# Altium PCB MainBayPCB_v2.1.PcbDoc
Units mm, origin at the board's own origin, x right, y up, seen from the top; angles counter-clockwise.
Board outline 100 x 150 mm, 2 copper layers (Top Layer, Bottom Layer); 30 components, 28 nets, 186 pads, 32 vias.
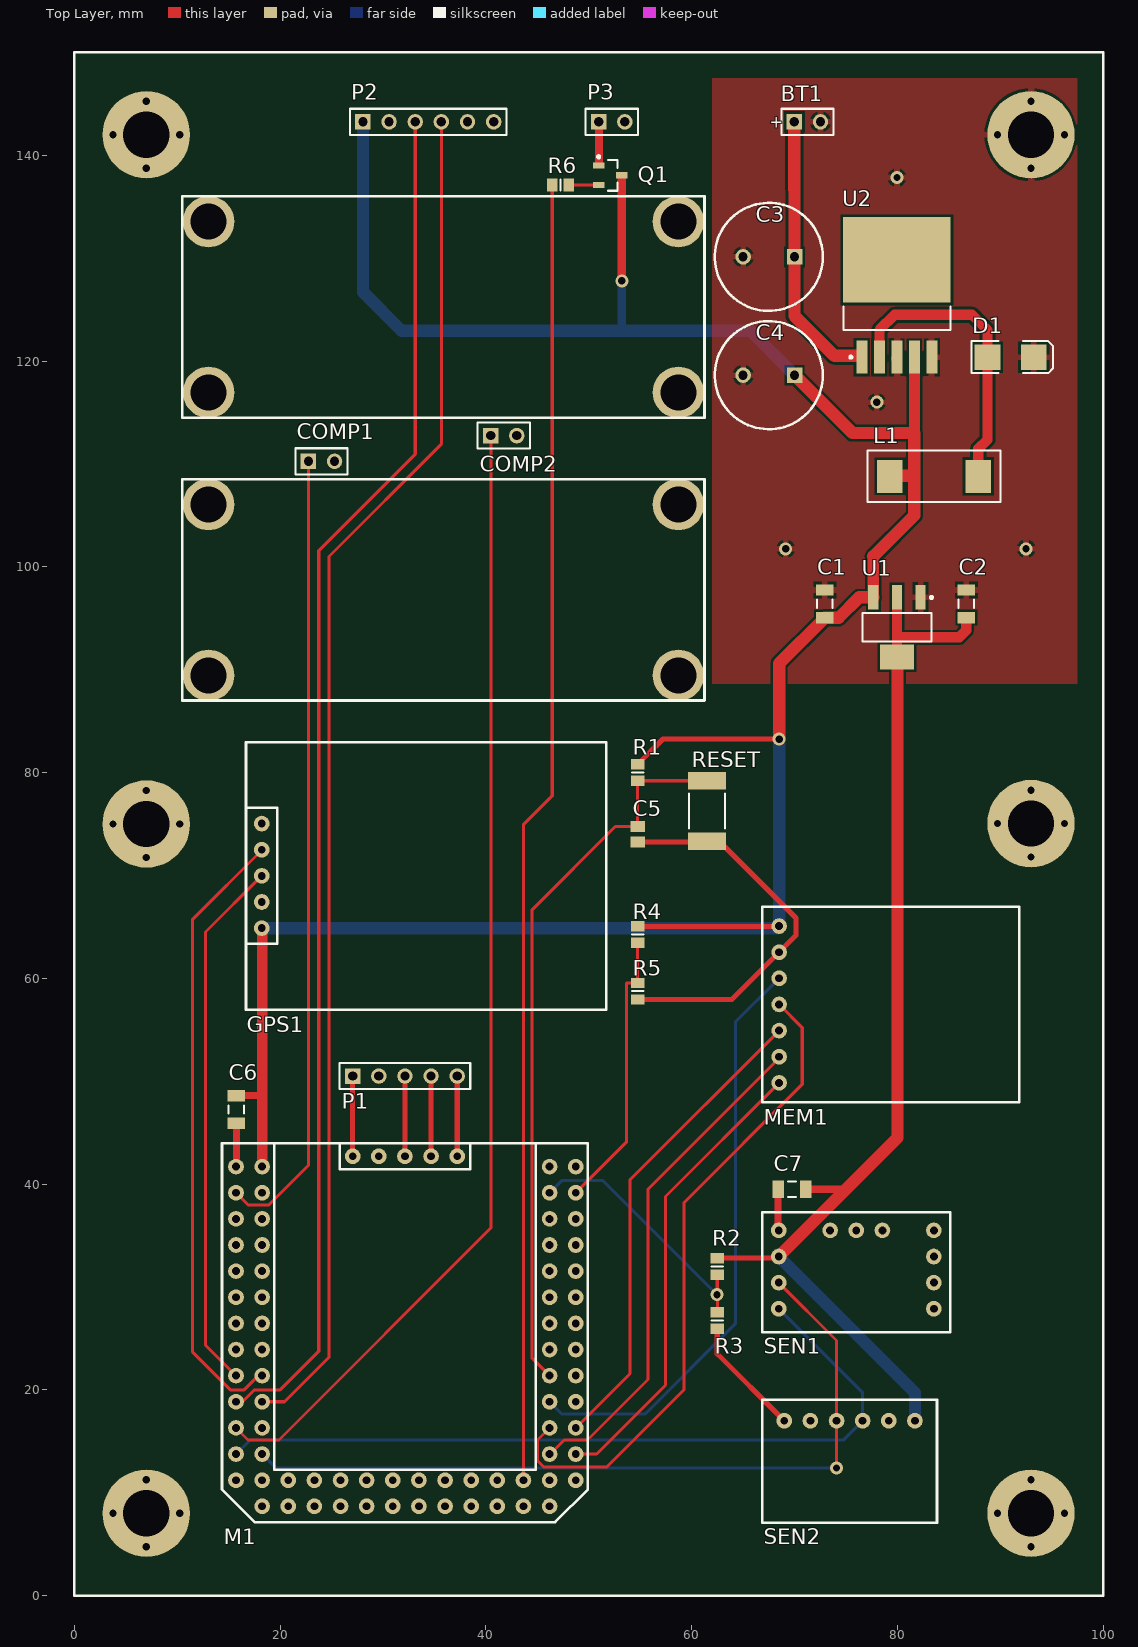
[diagram p0: Top Layer view]
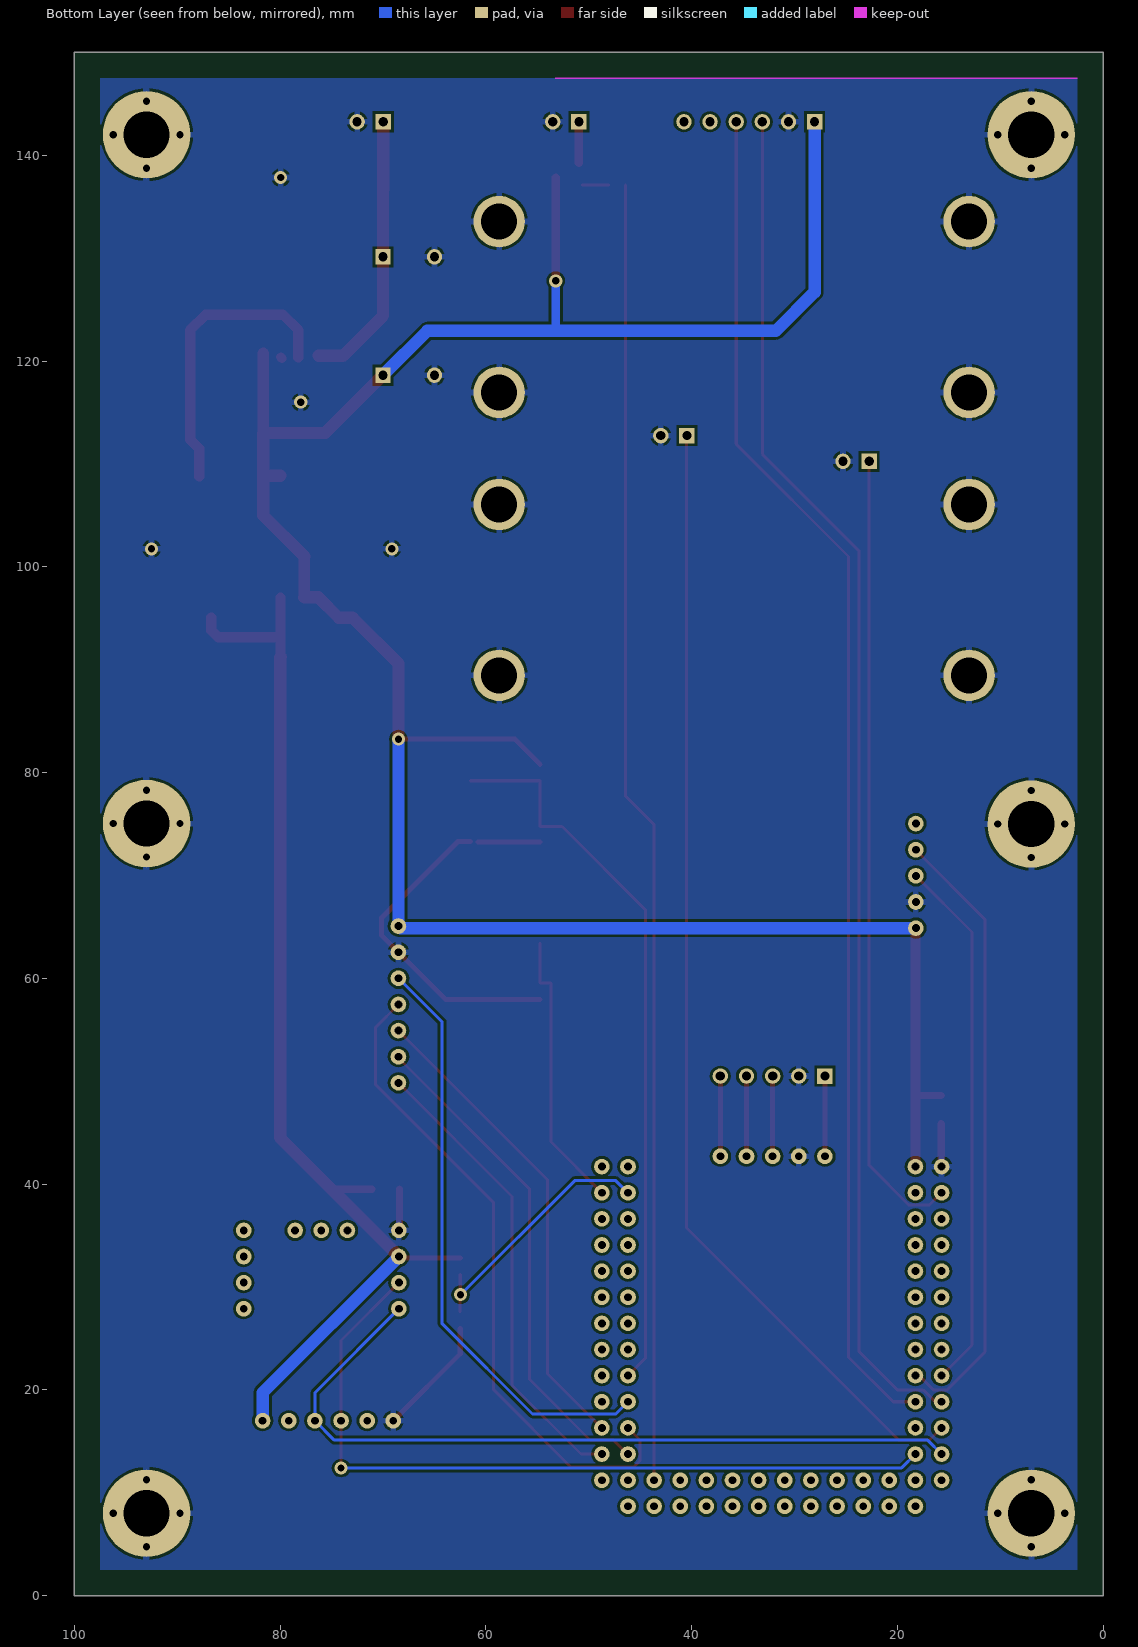
[diagram p1: Bottom Layer view, seen from below]

## Layer stack, top to bottom
Top Solder: solder mask 0.0102, Solder Resist, Dk 3.5
Top Layer: signal copper 0.0356
Dielectric 1: dielectric 0.32, FR-4, Dk 4.8
Bottom Layer: signal copper 0.0356
Bottom Solder: solder mask 0.0102, Solder Resist, Dk 3.5

## Board outline
0,0 100,0 100,150 0,150

## Design rules (kind name [scope] priority, off if disabled: settings)
Clearance [All] p1: gap=0.254 ignorepadtopadclearanceinfootprint=FALSE except(0: Arc-Hole Track-Hole SMDPad-Hole THPad-Hole Via-Hole Fill-Hole Poly-Hole Region-Hole Text-Hole)
PolygonConnect [All] p1: connectstyle=Relief reliefconductorwidth=0.6 reliefentries=4 polygonreliefangle="90 Angle" airgapwidth=0.254
RoutingVias [All] p1: holewidth=0.711 width=1.27 viastyle="Through Hole" minholewidth=0.711 minwidth=1.27 maxholewidth=0.711 maxwidth=1.27
SMDNeckDown [All] p1: percent=50.000
SolderMaskExpansion [All] p1: expansion=0.102
Width Camera [InNet('NetP3_1')] p1: maxlimit=1 minlimit=0.8 preferedwidth=0.8 minimp=50.000000 maximp=50.000000 favimp=50.000000
Width D1 [InNet('NetD1_1')] p2: maxlimit=1.2 minlimit=1 preferedwidth=1.1 minimp=50.000000 maximp=50.000000 favimp=50.000000
Width VBAT [InNet('VBAT')] p3: maxlimit=1.2 minlimit=1 preferedwidth=1.2 minimp=50.000000 maximp=50.000000 favimp=50.000000
Width GND [InNet('GND')] p4: maxlimit=1.2 minlimit=0.5 preferedwidth=1.2 minimp=50.000000 maximp=50.000000 favimp=50.000000
Width 5VDC [InNet('+5VDC')] p5: maxlimit=1.2 minlimit=0.5 preferedwidth=1.2 minimp=50.000000 maximp=50.000000 favimp=50.000000
Width 3.3VDC [InNet('+3.3VDC')] p6: maxlimit=1.2 minlimit=0.5 preferedwidth=1.2 minimp=50.000000 maximp=50.000000 favimp=50.000000
Width [All] p7: maxlimit=0.3 minlimit=0.25 preferedwidth=0.3 minimp=50.000000 maximp=50.000000 favimp=50.000000
30 further rules are at their usual default settings.

## Components (designator, comment, footprint, x,y, rotation, side; value= is the part's Value field where it differs from the comment)
BT1 "Battery" BAT-2 71.25,143.25 r0 top
C1 "Cap Semi" C1206 72.95,96.402 r270 top value=1uF
C2 "Cap Semi" C1206 86.7,96.402 r270 top value=100pF
C3 "Cap Pol3" RB5-10.5 67.5,130.125 r180 top value=680uF
C4 "Cap Pol3" RB5-10.5 67.5,118.625 r180 top value=10uF
C5 "Cap Pol3" C0805 54.75,74 r270 top value=10uF
C6 "Cap Semi" C1206 15.75,47.25 r90 top value=1uF
C7 "Cap Semi" C1206 69.75,39.5 r0 top value=1uF
COMP1 "Header 2" HDR1X2 22.75,110.25 r0 top
COMP2 "Header 2" HDR1X2 40.46,112.75 r0 top
D1 "D Schottky" SMB 91,120.375 r0 top
GPS1 "Neo-6M Module" "Neo-6M GPS Module" 18.21,75.04 r270 top
L1 "Inductor" Inductor 83.55,108.791 r180 top value=33uH
M1 "ATMega2560 Breakout" "ATMEGA2560 Breakout" 37.21,42.7 r180 top
MEM1 "uSD Card Reader" "uSD Card Reader" 68.5,65.08 r270 top
P1 "Serial Connector" HDR1X5 27.05,50.5 r0 top
P2 "Radio Connector" HDR1X6 28.05,143.25 r0 top
P3 "Header 2" HDR1X2 50.96,143.25 r0 top
Q1 "PNP" SOT-23B_N 52.085,138.05 r0 top
R1 "Res3" 6-0805_L 54.75,80 r270 top value=10K
R2 "Res3" 6-0805_L 62.5,32 r90 top value=1M
R3 "Res3" 6-0805_L 62.5,26.75 r270 top value=100K
R4 "Res3" 6-0805_L 54.75,64.25 r90 top value=1M
R5 "Res3" 6-0805_L 54.75,58.75 r270 top value=100K
R6 "Res3" 6-0805_L 47.25,137.111 r0 top value=10K
RESET "KSS221GLFS" KSS-2G 61.5,76.25 r270 top
SEN1 "IMU" "Sparkfun IMU" 78.54,35.5 r180 top
SEN2 "Pressure Sensor" "Barometric Pressure Sensor" 81.7,17 r180 top
U1 "LD1117S33TR" SOT-223_N 79.95,94.125 r270 top
U2 "LM2592HVS-5.0/NOPB" TS5B_N 79.95,126.375 r90 top

## Footprints (in the part's own frame and the unit in brackets; to place one, negate y for a bottom-side part, rotate by r counter-clockwise, add the part's x,y. Pads: shape width x height; smd on the part's side, far side on the other; paste and mask are expansions set on the pad)
6-0805_L [mm] "Chip Resistor, Body 2.0x1.2mm, IPC High Density"
  rect 1x1.3 smd: 1(-0.8,0) 2(0.8,0)
  silkscreen extent 0,-0.55 0,0.55, body extent -1.07,-0.7 1.07,0.7, height 0.7
"ATMEGA2560 Breakout" [mil] "Tindie breakout board for ATMega2560"
  round 60 hole 30: 2(746.45,239.37) 3(846.45,239.37) 4(746.45,339.37) 5(846.45,339.37) 6(746.45,439.37) 7(846.45,439.37) 8(746.45,539.37) 9(846.45,539.37) 10(746.45,639.37) 11(846.45,639.37) 12(746.45,739.37) 13(846.45,739.37) 22(746.45,1239.37) 23(846.45,1239.37) 24(746.45,1339.37) 25(646.45,1239.37) 26(646.45,1339.37) 27(546.45,1239.37) 28(546.45,1339.37) 29(446.45,1239.37) 30(446.45,1339.37) 31(346.45,1239.37) 32(346.45,1339.37) 33(246.45,1239.37) 34(246.45,1339.37) 35(146.45,1239.37) 36(146.45,1339.37) 37(46.45,1239.37) 38(46.45,1339.37) 39(-53.55,1239.37) 40(-53.55,1339.37) 41(-153.55,1239.37) 42(-153.55,1339.37) 43(-253.55,1239.37) 44(-253.55,1339.37) 45(-353.55,1339.37) 46(-353.55,1239.37) 47(-453.55,1239.37) 48(-353.55,1139.37) 49(-453.55,1139.37) A0(-453.55,39.37) A1(-353.55,39.37) A2(-453.55,139.37) A3(-353.55,139.37) A4(-453.55,239.37) A5(-353.55,239.37) A6(-453.55,339.37) A7(-353.55,339.37) A8(-453.55,439.37) A9(-353.55,439.37) A10(-453.55,539.37) A11(-353.55,539.37) A12(-453.55,639.37) A13(-353.55,639.37) A14(-453.55,739.37) A15(-353.55,739.37) DTR(0,0) EXT5V(746.45,39.37) GND(300,0) GND(846.45,39.37) MISO(-353.55,1039.37) MOSI(-453.55,1039.37) REF(-453.55,839.37) RESET(-353.55,839.37) RX(200,0) RX0(846.45,139.37) RX1(846.45,1039.37) RX2(846.45,939.37) RX3(846.45,839.37) SCK(-353.55,939.37) SCl(846.45,1139.37) SDA(746.45,1139.37) SS(-453.55,939.37) TX(100,0) TX0(746.45,139.37) TX1(746.45,1039.37) TX2(746.45,939.37) TX3(746.45,839.37) "USB 5V"(400,0)
  silkscreen extent -500,-50 900,1400
"Barometric Pressure Sensor" [mil]
  round 60 hole 30: 1(0,0) 2(100,0) 3(200,0) 4(300,0) 5(400,0) 6(500,0)
  silkscreen extent -84,-80 585,390
BAT-2 [mm] "Battery; 2 Leads"
  rect 1.5x1.5 hole 0.9: 1(-1.27,0)
  round 1.5 hole 0.9: 2(1.27,0)
  silkscreen extent -2.54,-1.27 2.54,1.27
C0805 [mm] "Chip Capacitor, Body 2.0x1.3mm, IPC High Density"
  rect 1.1x1.4 smd: 1(-0.75,0) 2(0.75,0)
  body extent -1.1,-0.72 1.1,0.72, height 1.4
C1206 [mm] "Chip Capacitor, Body 3.2x1.6mm, IPC High Density"
  rect 1.1x1.7 smd: 1(-1.35,0) 2(1.35,0)
  silkscreen extent -0.4,-0.75 0.4,0.75, body extent -1.7,-0.9 1.7,0.9, height 1.3
HDR1X2 [mm] "Connector; Header; 2 Position"
  rect 1.5x1.5 hole 0.9: 1(0,0)
  round 1.5 hole 0.9: 2(2.54,0)
  silkscreen extent -1.27,-1.27 3.81,1.27
HDR1X5 [mm] "Connector; Header; 5 Position"
  rect 1.5x1.5 hole 0.9: 1(0,0)
  round 1.5 hole 0.9: 2(2.54,0) 3(5.08,0) 4(7.62,0) 5(10.16,0)
  silkscreen extent -1.27,-1.27 11.43,1.27
HDR1X6 [mm] "Connector; Header; 6 Position"
  rect 1.5x1.5 hole 0.9: 1(0,0)
  round 1.5 hole 0.9: 2(2.54,0) 3(5.08,0) 4(7.62,0) 5(10.16,0) 6(12.7,0)
  silkscreen extent -1.27,-1.27 13.97,1.27
Inductor [mm]
  rect 2.5x3.2 smd: 1(-4.304,0) 2(4.304,0)
  silkscreen extent -6.45,-2.5 6.45,2.5
KSS-2G [mm] "Switch, Side Tact, SM; 2 Leads; Body 7x3.5mm (LxW)"
  rect 1.7x3.7 smd: 1(2.95,0) 2(-2.95,0)
  silkscreen extent -1.7,-1.75 1.7,1.75, body extent -2.75,-2.65 2.75,1.75, height 1.75
"Neo-6M GPS Module" [mil] "GPS Module"
  round 60 hole 30: 1(0,0) 2(100,0) 3(200,0) 4(300,0) 5(400,0)
  silkscreen extent -312,-60 712,1318
RB5-10.5 [mm] "Capacitor (Radial); 2 Leads"
  rect 1.5x1.5 hole 0.9: 1(-2.5,0)
  round 1.5 hole 0.9: 2(2.5,0)
  silkscreen extent -5.25,-5.25 5.25,5.25
SMB [mm] "DO-214-AA/SMB; 2 C-Bend Leads; Body 5.3 x 3.6 mm, inc. leads (LxW)"
  rect 2.5x2.5 smd: 1(-2.25,0) 2(2.25,0)
  silkscreen extent -3.8,-1.55 4.1,1.55
SOT-23B_N [mm] "SOT23, 3-Leads, Body 2.9x1.3mm, Pitch 0.95mm, Lead Span 2.4mm, IPC Medium Density"
  rect 1.15x0.6 smd: 1(-1.125,0.95) 2(-1.125,-0.95) 3(1.125,0)
  silkscreen extent -1.25,-1.5 0.7,1.92, body extent -0.7,-1.5 0.7,1.5, height 1.14
SOT-223_N [mm] "SOT223, 4-Leads, Body 6.5x3.5mm, Pitch 2.3mm, Lead Span 7mm, IPC Medium Density"
  rect 2.4x1 smd: 1(-2.9,2.3) 2(-2.9,0) 3(-2.9,-2.3)
  rect 2.4x3.3 smd: 4(2.9,0)
  silkscreen extent -3.02,-3.35 1.4,3.48, body extent -1.85,-3.35 1.85,3.35, height 1.8
"Sparkfun IMU" [mil] "MPU-9250 breakout footprint"
  round 60 hole 30: 1(-196.85,300) 2(-196.85,200) 3(-196.85,100) 4(-196.85,0) 5(0,0) 6(100,0) 7(200,0) 8(396.85,0) 9(396.85,100) 10(396.85,200) 11(396.85,300)
  silkscreen extent -260,-70 460,390
TS5B_N [mm] "D2-PAK, 6-Leads, Body 8.6x10.2mm, Pitch 1.7mm, Lead Span 14.1mm, IPC Medium Density"
  rect 3.2x1.05 smd: 1(-6,3.4) 2(-6,1.7) 3(-6,0) 4(-6,-1.7) 5(-6,-3.4)
  rect 8.3x10.45 smd: 6(3.45,0)
  silkscreen extent -6.12,-5.2 -1.1,5.2, body extent -3.35,-5.2 6.05,5.2, height 4.65
"uSD Card Reader" [mil] "micro SD card reader from sparkfun"
  round 60 hole 30: 1(600,0) 2(500,0) 3(400,0) 4(300,0) 5(200,0) 6(100,0) 7(0,0)
  silkscreen extent -74,-65 674,919

## Part data
BT1: "Multicell Battery", LatestRevisionDate=17-Jul-2002, LatestRevisionNote="Re-released for DXP Platform.", PackageDescription="Battery; 2 Leads", PackageReference=BAT-2, Published=24-Mar-1999, Publisher="Altium Limited"
C1 C2 C6 C7: "Capacitor (Semiconductor SIM Model)", LatestRevisionDate=29-May-2009, LatestRevisionNote="IPC-7351 Footprint Added.", PackageDescription="Chip Capacitor", PackageReference=C1206, Published=8-Jun-2000, Publisher="Altium Limited"
C3 C4 C5: "Polarized Capacitor (Surface Mount)", LatestRevisionDate=29-May-2009, LatestRevisionNote="IPC-7351 Footprint Added.", PackageDescription="Chip Capacitor", PackageReference=C0805, Published=8-Jun-2000, Publisher="Altium Limited"
COMP1 COMP2 P3: "Header, 2-Pin", LatestRevisionDate=17-Jul-2002, LatestRevisionNote="Re-released for DXP Platform.", Publisher="Altium Limited"
D1: "Schottky Diode", Code_JEDEC=DO-214-AA, LatestRevisionDate=17-Jul-2002, LatestRevisionNote="Re-released for DXP Platform.", PackageDescription="DO-214-AA/SMB; 2 C-Bend Leads; Body 5.3 x 3.6 mm, inc. leads (LxW)", PackageReference=SMB, Published=8-Jun-2000, Publisher="Altium Limited"
GPS1: "Serial GPS module"
M1: "Tindie's breakout board for the ATMega2560"
MEM1: "SPI interface micro SD card reader from sparkfun.", Date created="July 29, 2018"
P1: library part "Header 5", "Header, 5-Pin", LatestRevisionDate=17-Jul-2002, LatestRevisionNote="Re-released for DXP Platform.", Publisher="Altium Limited"
P2: library part "Header 6", "Header, 6-Pin", LatestRevisionDate=17-Jul-2002, LatestRevisionNote="Re-released for DXP Platform.", Publisher="Altium Limited"
Q1: "PNP Bipolar Transistor", LatestRevisionDate=29-May-2009, LatestRevisionNote="IPC-7351 Footprint Added.", PackageDescription="3-Pin SOT-23 Package 0.95 mm Pitch, 2.4 mm Lead Span", PackageReference=SOT-23B, PackageVersion=Aug-1999, Published=8-Jun-2000, Publisher="Altium Limited"
R1 R2 R3 R4 R5 R6: "Resistor", LatestRevisionDate=29-May-2009, LatestRevisionNote="IPC-7351 Footprint Added.", PackageDescription="Chip Resistor", PackageReference=J1-0603, Published=8-Jun-2000, Publisher="Altium Limited"
RESET: "Switch, Subminiature Side-Actuated Tact, SMT, KSS Series, Std Actuator, 2 Gull Wing Leads, SPST, 2N Force, Silver Contact", ComponentLink1Description="Manufacturer Link", ComponentLink1URL=http://www.ck-components.com/, ComponentLink2Description=Datasheet, ComponentLink2URL=http://www.ck-components.com/media/pdf/catalogs/Tactile_Switches%5CKSS_series_Tactile_August_2007.pdf, DatasheetVersion=Aug-2007, PackageDescription="Subminiature SMT Side Actuated Switch, Body 7 x 3.5 mm (LxW)", PackageReference=KSS-2G, PackageVersion=Aug-2007, PCB_Layout="Complies with manufacturer's recommendation.", Published=14-Mar-2008, Publisher="Altium Limited"
SEN1: library part "Inertial Measurement Unit", "MPU-9250 breakout board from sparkfun."
SEN2: library part "Baromateric Pressure Sensor", "MS5611-01BA03 Barometric Pressure Sensor, Variometer."
U1: "Fixed Low Drop Positive Voltage Regulator, 3.3V, 4-Pin SOT-223, Tape and Reel", ComponentLink1Description="Manufacturer URL", ComponentLink1URL=http://www.st.com, ComponentLink2Description=Datasheet, ComponentLink2URL=http://www.st.com/internet/com/TECHNICAL_RESOURCES/TECHNICAL_LITERATURE/DATASHEET/CD00000544.pdf, DatasheetVersion=Nov-2011, PackageDescription="4-Pin SOT-223 Package, 6.5 x 3.5 mm Body, 2.3 mm Pitch, 7 mm Lead Span", PackageReference=SOT-223, PackageVersion=2010, PartNumber=LD1117S33TR
U2: "SIMPLE SWITCHER® Power Converter 150 KHz 2A Step-Down Voltage Regulator, 5-pin TO-263, Pb-Free", Manufacturer="National Semiconductor", PackageTopMarking="NSUZXYTTE#*LM2592HVS*-5.0 P+", PowerWise=N, Supplier Part Number 1=LM2592HVS-5.0-ND, Code_JEDEC=MO-169-AB, ComponentLink1Description="LM2592HV Datasheet", ComponentLink1URL=http://www.national.com/ds/LM/LM2592HV.pdf, ComponentLink2Description="LM2592HV Web Page", ComponentLink2URL=http://www.national.com/pf/LM/LM2592HV.html, ComponentLink3Description="TS5B Package Page", ComponentLink3URL=http://www.national.com/packaging/folders/ts5b.html, CompType=Switcher, DatasheetVersion=Aug-2001, PackageDescription="TO-263, Molded, .400 x .390 x .180in, 5 Lead, .067in Pitch, Surface Mount", PackageReference=TS5B, PackageVersion="revD, Apr-2005", PartNumber=LM2592HVS-5.0/NOPB, PinCount=5, Published=1-Mar-2010, Publisher="Altium Limited", RoHS=Y, Supplier 1=Digi-Key, Supplier 2=Farnell, Supplier Part Number 2=1469187
L1: Code_IEC=1005, Code_JEITA=0402, LatestRevisionDate=29-May-2009, LatestRevisionNote="IPC-7351 Footprint Added.", PackageDescription="Chip Inductor", PackageReference=0402-A, Published=8-Jun-2000, Publisher="Altium Limited"

## Free pads (board coordinates)
  round 8.5 hole 4.5: Mount(7,8) Mount(7,75) Mount(7,142) Mount(92.982,8) Mount(92.982,75.04) Mount(92.982,142)
  round 5 hole 3.5: Mount(13.04,89.445) Mount(13.04,106.055) Mount(13.04,116.945) Mount(13.04,133.555) Mount(58.71,89.445) Mount(58.71,106.055) Mount(58.71,116.945) Mount(58.71,133.555)

## Via types
v1: diameter 1.27, hole 0.711, Top Layer to Bottom Layer, 32 vias

## Nets (pads, with @x,y where several pads share a name; then routed paths per layer and width w, separated by ;. In a path a pad name is that pad's centre, name@x,y a point inside that pad or via, vN(x,y) a via of type N, cw(c..) or ccw(c..) an arc to the next point about the centre after c; other vN are vias at no path point)
+3.3VDC: C2.2 C7.2 R2.2 SEN1.9 SEN2.1 U1.2 U1.4 | length 108.4
  Top Layer w0.5: R2.2 SEN1.9@68.46,32.8
  Top Layer w0.7: C7.2 75,39.5
  Top Layer w1: U1.4@79.965,91.225 U1.2@79.965,97.025 ; 80,93.143 86.016,93.143 86.7,93.828 C2.2
  Top Layer w1.2: SEN1.9 80,44.5 80,91.175 U1.4 U1.4@79.965,91.225
  Bottom Layer w1.2: SEN1.9 81.7,19.72 SEN2.1
+5VDC: C1.2 C4.1 C6.2 GPS1.5 L1.2 M1.EXT5V MEM1.7 P2.1 Q1.3 R1.1 R4.2 U1.3 U2.4 | length 259.1
  Top Layer w0.5: R4.2 MEM1.7@68,65.05 ; R1.1 57.2,83.25 v1(68.5,83.25)
  Top Layer w0.7: C6.2 18.25,48.6
  Top Layer w0.8: v1(53.21,127.79) Q1.3@53.21,137.83
  Top Layer w1: M1.EXT5V GPS1.5@18.25,64.84
  Top Layer w1.1: U1.3 77.65,101.014 ; 81.65,113 U2.4 U2.4@81.65,120.75
  Top Layer w1.2: GPS1.5 GPS1.5@18.25,64.84 ; v1(68.5,83.25) 68.5,90.602 C1.2 74.301,95.052 76.274,97.025 U1.3 ; C4.1 75.625,113 81.65,113 81.65,105.014 77.65,101.014 ; L1.2@79.971,108.838 81.571,108.838
  Bottom Layer w0.8: 53.21,122.978 v1(53.21,127.79)
  Bottom Layer w1.2: GPS1.5 68.3,64.88 MEM1.7 v1(68.5,83.25) ; P2.1 28.05,126.7 31.812,122.938 65.687,122.938 C4.1
GND: BT1.2 C1.1 C2.1 C3.2 C4.2 C5.2 C6.1 C7.1 COMP1.2 COMP2.2 D1.2 GPS1.4 M1.GND MEM1.6 P1.2 P2.2 P3.2 pad.Mount R3.2 R5.2 RESET.1 SEN1.8 SEN2.6 U1.1 U2.3 U2.5 | length 76.1
  Top Layer w0.5: R5.2 63.9,57.95 70.135,64.185 70.135,65.865 62.7,73.3 RESET.1 ; C5.2 RESET.1@60.75,73.25 ; R3.2 62.49,25.95 62.49,23.51 68.875,17.125 SEN2.6@69.125,17.125
  Top Layer w0.7: M1.GND@15.75,41.74 C6.1 ; SEN1.8@68.4,35.5 C7.1
  Top Layer w0.9: U2.3@79.824,120.249 U2.3
  Top Layer w1.2: v1(3.75,8) v1(7,4.75) ; v1(3.75,142) v1(7,138.75) ; v1(92.982,4.75) v1(96.232,8) ; v1(92.982,71.79) v1(96.232,75.04)
  Bottom Layer w1.2: pad.Mount@89.561,75.211 v1(89.732,75.04)
  other v1: 10.25,8 89.732,8 7,11.25 92.982,11.25 7,71.75 3.75,75 10.25,75 7,78.25 92.982,78.29 69.139,101.75 92.5,101.75 78,116 79.95,137.83 92.982,138.75 10.25,142 89.732,142 96.232,142 7,145.25 92.982,145.25
NetC5_1: C5.1 M1.RESET R1.2 RESET.2 | length 70.8
  Top Layer w0.3: M1.RESET 44.5,23.07 44.5,66.666 52.584,74.75 C5.1 R1.2 58.121,79.2 RESET.2
NetCOMP1_1: COMP1.1 M1.RX0 | length 77.6
  Top Layer w0.3: M1.RX0 16.896,37.975 18.904,37.975 22.75,41.821 COMP1.1
NetCOMP2_1: COMP2.1 M1.RX1 | length 110.9
  Top Layer w0.3: M1.RX1 16.876,15.134 19.884,15.134 40.5,35.75 40.5,112.75 COMP2.1
NetD1_1: D1.1 L1.1 U2.2 | length 29
  Top Layer w1: U2.2 78.25,123.024 79.726,124.5 87.25,124.5 88.726,123.024 88.75,123 D1.1 88.75,115.911 88.75,112.359 87.854,111.463 L1.1
NetGPS1_2: GPS1.2 M1.TX3 | length 60.5
  Top Layer w0.3: GPS1.2 18.23,72.48 11.5,65.75 11.5,23.661 15.155,20.006 16.506,20.006 17.88,21.38 M1.TX3
NetGPS1_3: GPS1.3 M1.RX3 | length 52.1
  Top Layer w0.3: M1.RX3 12.75,24.34 12.75,64.5 GPS1.3
NetM1_43: M1.43 R6.1 | length 127
  Top Layer w0.3: M1.43 43.643,11.22 43.643,74.933 46.45,77.74 R6.1@46.45,137.1
NetM1_48: M1.48 MEM1.2 | length 49.1
  Top Layer w0.3: M1.48 46.26,13.76 47.625,15.125 49.875,15.125 55.75,21 55.75,39.5 MEM1.2@68.5,52.25
NetM1_49: M1.49 MEM1.1 | length 45.5
  Top Layer w0.3: M1.49 50.76,13.76 57.46,20.46 57.46,38.8 MEM1.1
NetM1_A2: M1.A2 R4.1 R5.1 | length 27.4
  Top Layer w0.3: M1.A2 53.676,44.106 53.676,59.55 R5.1 R4.1
NetM1_A3: M1.A3 R2.1 R3.1 | length 27
  Top Layer w0.3: v1(62.465,29.25) 62.465,31.2 R2.1 R3.1
  Bottom Layer w0.3: M1.A3 47.367,40.337 51.378,40.337 v1(62.465,29.25)
NetM1_DTR: M1.DTR P1.5 | length 7.8
  Top Layer w0.5: M1.DTR P1.5
NetM1_MISO: M1.MISO MEM1.4 | length 64.4
  Top Layer w0.3: M1.MISO 45.015,15.125 45.015,13.108 45.624,12.498 51.748,12.498 59.25,20 59.25,38.2 70.75,49.7 70.75,55.21 MEM1.4
NetM1_MOSI: M1.MOSI MEM1.3 | length 46.8
  Top Layer w0.3: M1.MOSI 54.006,21.576 54.006,40.426 MEM1.3
NetM1_RX: M1.RX P1.3 | length 7.8
  Top Layer w0.5: M1.RX P1.3
NetM1_RX2: M1.RX2 P2.3 | length 133.5
  Top Layer w0.3: M1.RX2 16.34,18.84 17.506,20.006 20.006,20.006 23.75,23.75 23.75,101.571 33.13,110.951 P2.3
NetM1_SCK: M1.SCK MEM1.5 | length 57.5
  Bottom Layer w0.3: M1.SCK 47.376,17.655 55.48,17.655 64.25,26.425 64.25,55.75 MEM1.5
NetM1_SCL: M1.SCl SEN1.11 SEN2.3 | length 76.5
  Bottom Layer w0.3: M1.SCl 17.065,15.115 74.735,15.115 SEN2.3 76.62,19.72 SEN1.11
NetM1_SDA: M1.SDA SEN1.10 SEN2.4 | length 76.7
  Top Layer w0.3: SEN1.10 74.08,24.8 SEN2.4 v1(74.08,12.397)
  Bottom Layer w0.3: M1.SDA 19.588,12.422 39.554,12.422 39.579,12.397 v1(74.08,12.397)
NetM1_TX: M1.TX P1.4 | length 7.8
  Top Layer w0.5: M1.TX P1.4
NetM1_TX2: M1.TX2 P2.4 | length 132.9
  Top Layer w0.3: M1.TX2 20.42,18.84 24.75,23.17 24.75,101 35.67,111.92 P2.4
"NetM1_USB 5V": "M1.USB 5V" P1.1 | length 7.8
  Top Layer w0.5: 27.05,42.7 P1.1
NetP3_1: P3.1 Q1.1 | length 4.3
  Top Layer w0.3: Q1.1 Q1.1@50.96,139.25
  Top Layer w0.8: Q1.1@50.96,139.25 50.984,139.274 P3.1@50.984,143.25
NetQ1_2: Q1.2 R6.2 | length 2.6
  Top Layer w0.3: R6.2 Q1.2@50.668,137.111
VBAT: BT1.1 C3.1 U2.1 | length 26.8
  Top Layer w1.2: BT1.1 69.98,136.674 70,136.654 C3.1 70,124.394 73.894,120.5 U2.1@76.274,120.5
pads on no net: GPS1.1 M1.2 M1.3 M1.4 M1.5 M1.6 M1.7 M1.8 M1.9 M1.10 M1.11 M1.12 M1.13 M1.22 M1.23 M1.24 M1.25 M1.26 M1.27 M1.28 M1.29 M1.30 M1.31 M1.32 M1.33 M1.34 M1.35 M1.36 M1.37 M1.38 M1.39 M1.40 M1.41 M1.42 M1.44 M1.45 M1.46 M1.47 M1.A0 M1.A1 M1.A4 M1.A5 M1.A6 M1.A7 M1.A8 M1.A9 M1.A10 M1.A11 M1.A12 M1.A13 M1.A14 M1.A15 M1.REF M1.SS M1.TX0 M1.TX1 P2.5 P2.6 SEN1.1 SEN1.2 SEN1.3 SEN1.4 SEN1.5 SEN1.6 SEN1.7 SEN2.2 SEN2.5 U2.6

## Polygon pours and split planes (outlines as drawn)
GND on Bottom Layer "Bottom Layer-GND" (solid, pour order 4): 2.5,147.5 97.5,147.5 97.5,2.5 2.5,2.5
GND on Top Layer "Top Layer-GND" (solid, pour order 2): 97.5,147.5 97.5,88.625 62,88.625 62,147.5

## Keep-outs
Bottom Layer:
  region: 2.5,147.5 53.25,147.5

## Silkscreen, mask and mechanical layers (free items; w line width, h text height)
Top Overlay:
  lines w0.254: 66.856,25.594 66.856,37.278 85.144,37.278 ; 91.849,66.96 66.849,66.96 ; 66.849,66.96 66.849,47.96 66.849,66.96 ; 0,0 100,0 100,150 0,150 0,0 ; 10.5,87 10.5,108.5 61.25,108.5 61.25,87 10.5,87 ; 10.5,114.5 61.25,114.5 61.25,136 10.5,136 10.5,114.5

## Text inside footprints (layer, text, board x,y; h text height)
BT1: Top Overlay "+" at 67.58,142.673 h1.15